# Altium PCB PCB2.PcbDoc
Units mm, origin at the board's own origin, x right, y up, seen from the top; angles counter-clockwise.
Board outline 152.4 x 101.6 mm, 2 copper layers (Top Layer, Bottom Layer); 41 components, 48 nets, 134 pads, 0 vias.
Unrouted connection lines stored in the file: 71.
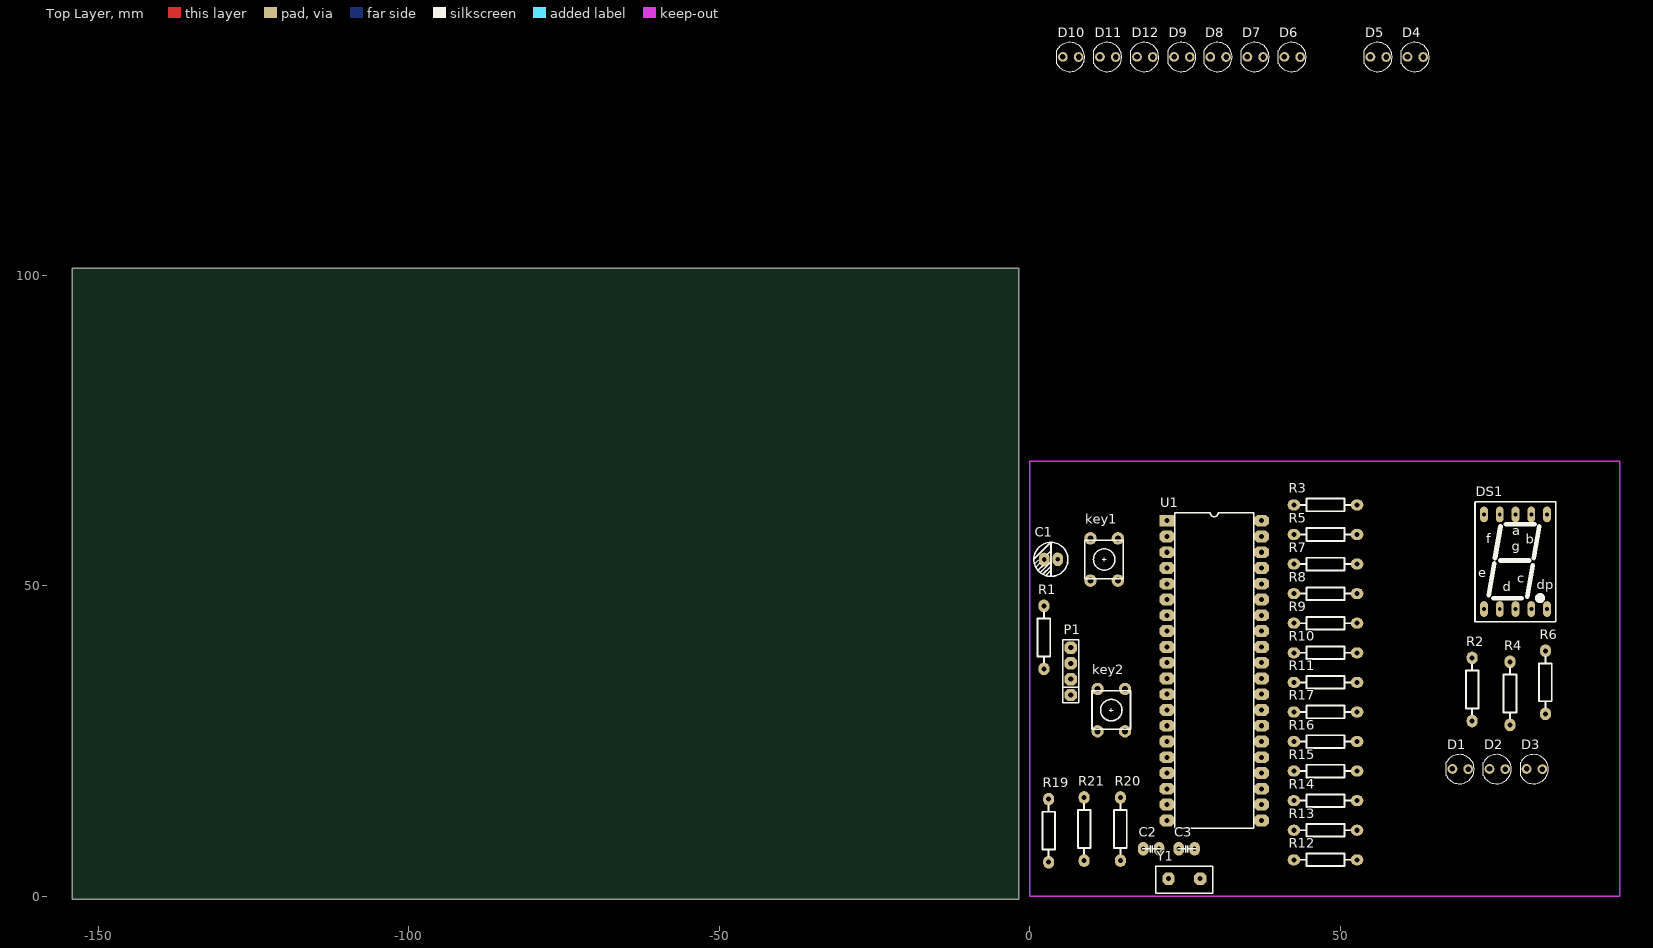
[diagram p0: Top Layer view]
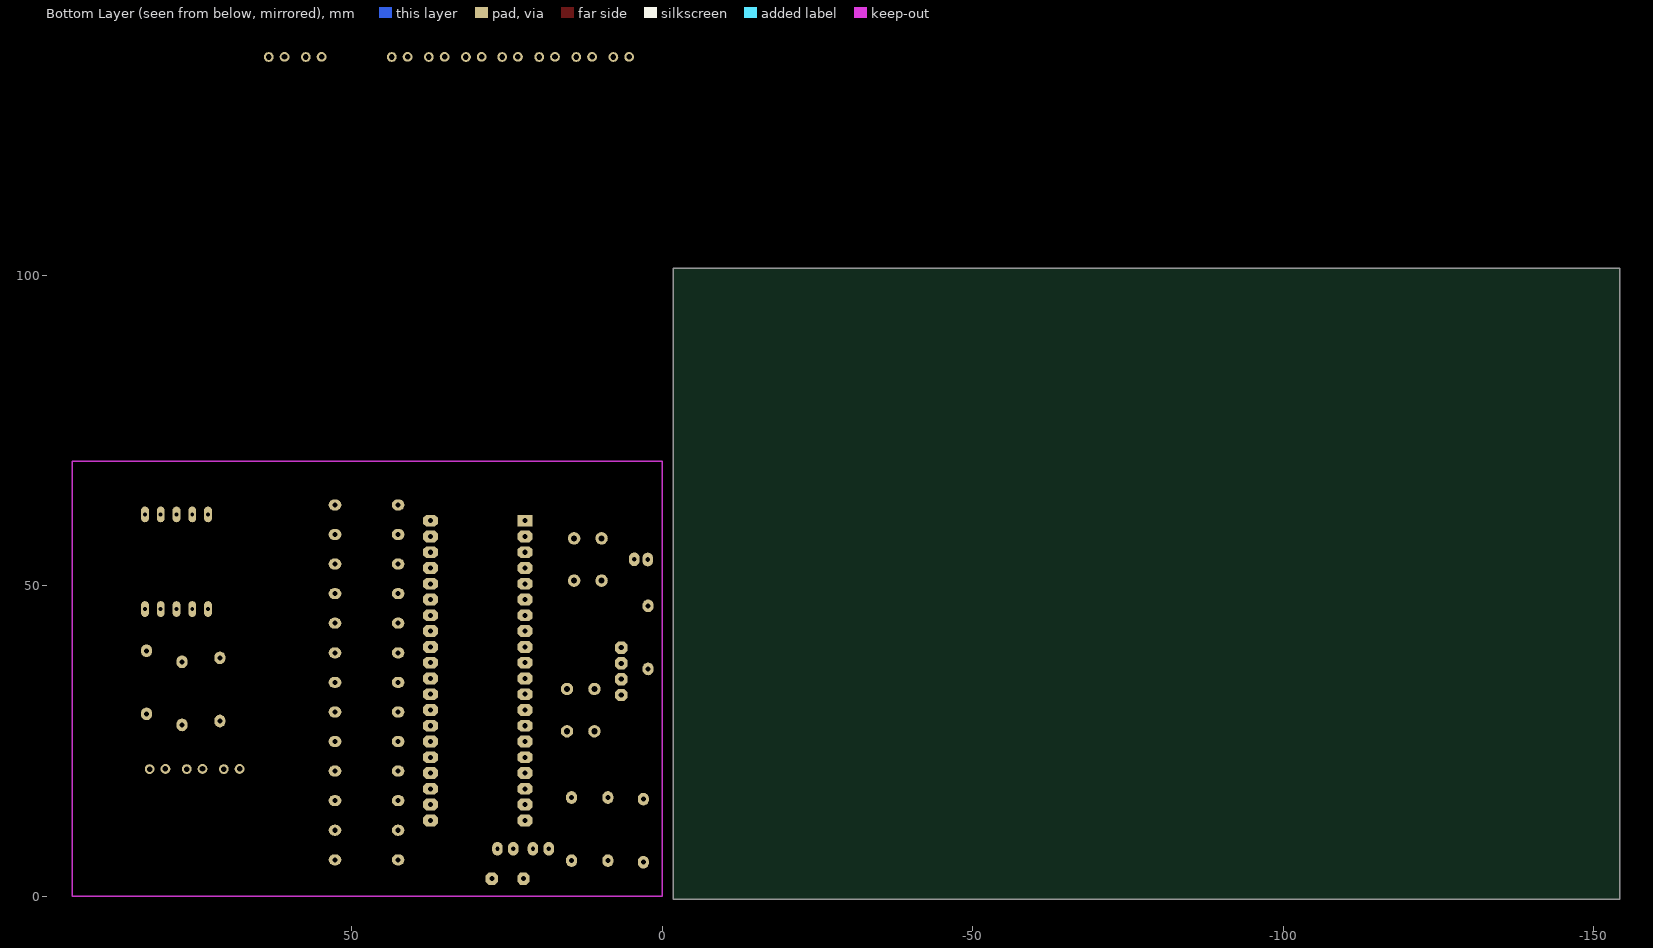
[diagram p1: Bottom Layer view, seen from below]

## Layer stack, top to bottom
Top Layer: signal copper 0.0356
Dielectric: dielectric 0.32, FR-4, Dk 4.8
Bottom Layer: signal copper 0.0356

## Board outline
-154.178,-0.508 -1.778,-0.508 -1.778,101.092 -154.178,101.092

## Design rules (kind name [scope] priority, off if disabled: settings)
Clearance [All] p1: gap=0.254
PolygonConnect [All] p1: connectstyle=Relief reliefconductorwidth=0.254 reliefentries=4 polygonreliefangle="90 Angle"
RoutingVias [All] p1: holewidth=0.711 width=1.27 viastyle="Through Hole" minholewidth=0.711 minwidth=1.27 maxholewidth=0.711 maxwidth=1.27
SilkscreenOverComponentPads [All] p1: minsilkscreentomaskgap=0.254
SolderMaskExpansion [All] p1: expansion=0.102
Width [All] p1: maxlimit=0.254 minlimit=0.254 preferedwidth=0.254
27 further rules are at their usual default settings.

## Components (designator, comment, footprint, x,y, rotation, side; value= is the part's Value field where it differs from the comment)
C1 "电解电容" D50V10UF 4.445,54.229 r180 top
C2 "33p" D104 18.288,7.62 r0 top
C3 "33p" D104 24.003,7.62 r0 top
D1 "B_G" LED 68.072,20.447 r0 top
D2 "B_Y" LED 74.041,20.447 r0 top
D3 "B_R" LED 80.01,20.447 r0 top
D4 "X_G" LED 60.833,135.128 r0 top
D5 "D_R" LED 54.864,135.128 r0 top
D6 "X_Y" LED 41.021,135.128 r0 top
D7 "D_Y" LED 35.052,135.128 r0 top
D8 "X_R" LED 29.083,135.128 r0 top
D9 "D_G" LED 23.241,135.128 r0 top
D10 "N_R" LED 5.334,135.128 r0 top
D11 "N_Y" LED 11.303,135.128 r0 top
D12 "N_G" LED 17.272,135.128 r0 top
DS1 "YELLOWCC" 0.5INCH-DISP 73.152,46.228 r0 top
key1 "KEY" 6X6X? 9.779,50.8 r0 top
key2 "KEY" 6X6X? 10.922,26.543 r0 top
P1 "Header 4" SIP4 6.604,32.385 r180 top
R1 "10K" AXIAL0.4 2.286,41.656 r270 top
R2 "10K" AXIAL0.4 71.247,33.274 r270 top
R3 "10K" AXIAL0.4 47.625,62.992 r180 top
R4 "10K" AXIAL0.4 77.343,32.639 r270 top
R5 "10K" AXIAL0.4 47.625,58.229 r180 top
R6 "10K" AXIAL0.4 83.058,34.417 r270 top
R7 "10K" AXIAL0.4 47.625,53.467 r180 top
R8 "10K" AXIAL0.4 47.625,48.704 r180 top
R9 "10K" AXIAL0.4 47.625,43.942 r180 top
R10 "10K" AXIAL0.4 47.625,39.179 r180 top
R11 "10K" AXIAL0.4 47.625,34.417 r180 top
R12 "10K" AXIAL0.4 47.625,5.842 r0 top
R13 "10K" AXIAL0.4 47.625,10.604 r0 top
R14 "10K" AXIAL0.4 47.625,15.367 r0 top
R15 "10K" AXIAL0.4 47.625,20.129 r0 top
R16 "10K" AXIAL0.4 47.625,24.892 r0 top
R17 "10K" AXIAL0.4 47.625,29.654 r0 top
R19 "10K" AXIAL0.4 3.048,10.541 r270 top
R20 "10K" AXIAL0.4 14.605,10.795 r270 top
R21 "10K" AXIAL0.4 8.763,10.795 r270 top
U1 "STC89C52RC" DIP40C 22.098,60.452 r0 top
Y1 "XTAL" 晶振 22.352,2.794 r0 top

## Footprints (in the part's own frame and the unit in brackets; to place one, negate y for a bottom-side part, rotate by r counter-clockwise, add the part's x,y. Pads: shape width x height; smd on the part's side, far side on the other; paste and mask are expansions set on the pad)
0.5INCH-DISP [mm]
  oval 1.27x2.54 hole 0.635: a(0,15.24) b(2.54,15.24) c(0,0) d(7.62,0) dp(2.54,0) e(5.08,0) f(10.16,15.24) g(10.16,0) m1(5.08,15.24) m2(7.62,15.24)
  silkscreen extent -1.45,-2.06 11.56,17.25
6X6X? [mm]
  round 2 hole 1: 1(0,0) 2(4.42,0) 3(4.42,6.807) 4(0,6.807)
  silkscreen extent -0.89,0.3 5.31,6.5
AXIAL0.4 [mil]
  oval 80x70 hole 32: 1(-200,0) 2(200,0)
  silkscreen extent -160,-40 160,40
D50V10UF [mil]
  oval 66.93x86.61 hole 30: 1(-2,0) 2(83,1)
  silkscreen extent -67,-108 149,108
D104 [mm]
  oval 1.7x2.2 hole 0.7: 1(0,0) 2(2.54,0)
  silkscreen extent -0.15,-0.55 2.82,0.52
DIP40C [mm]
  rect 2.4x1.9 hole 0.813: 1(0,0)
  oct 2.4x1.9 hole 0.813: 2(0,-2.54) 3(0,-5.08) 4(0,-7.62) 5(0,-10.16) 6(0,-12.7) 7(0,-15.24) 8(0,-17.78) 9(0,-20.32) 10(0,-22.86) 11(0,-25.4) 12(0,-27.94) 13(0,-30.48) 14(0,-33.02) 15(0,-35.56) 16(0,-38.1) 17(0,-40.64) 18(0,-43.18) 19(0,-45.72) 20(0,-48.26) 21(15.24,-48.26) 22(15.24,-45.72) 23(15.24,-43.18) 24(15.24,-40.64) 25(15.24,-38.1) 26(15.24,-35.56) 27(15.24,-33.02) 28(15.24,-30.48) 29(15.24,-27.94) 30(15.24,-25.4) 31(15.24,-22.86) 32(15.24,-20.32) 33(15.24,-17.78) 34(15.24,-15.24) 35(15.24,-12.7) 36(15.24,-10.16) 37(15.24,-7.62) 38(15.24,-5.08) 39(15.24,-2.54) 40(15.24,0)
  silkscreen extent 1.27,-49.53 13.97,1.27
LED [mil]
  round 62 hole 35.43: 1(0,1) 2(100,0)
  silkscreen extent -38,-93 138,93
SIP4 [mm]
  oct 2x2 hole 0.813: 1(0,0) 2(0,-2.54) 3(0,-5.08) 4(0,-7.62)
  silkscreen extent -1.27,-8.89 1.27,1.27
晶振 [mm]
  oct 2x2 hole 0.8: 1(0,0) 2(5.08,0)
  silkscreen extent -2.06,-2.31 7.11,2.03

## Part data
C1: "Capaci"
C2 C3: library part 普通电容, "Capaci"
D1 D2 D3 D4 D5 D6 D7 D8 D9 D10 D11 D12: library part LED
DS1: "Common Cathhode Seven-Segment Display, Right Hand Decimal"
P1: "Header, 4-Pin"
R1 R2 R3 R4 R5 R6 R7 R8 R9 R10 R11 R12 R13 R14 R15 R16 R17 R19 R20 R21: library part RES
U1: library part AT89C51
Y1: library part XTA

## Nets (pads, with @x,y where several pads share a name; then routed paths per layer and width w, separated by ;. In a path a pad name is that pad's centre, name@x,y a point inside that pad or via, vN(x,y) a via of type N, cw(c..) or ccw(c..) an arc to the next point about the centre after c; other vN are vias at no path point)
A: DS1.a R3.2
B: DS1.b R5.2
B_G: D1.2 R15.2
B_R: D3.2 R17.2
B_Y: D2.2 R16.2
C: DS1.c R7.2
D: DS1.d R8.2
D_G: D9.2 R6.2
D_R: D5.2 R2.2
D_Y: D7.2 R4.2
E: DS1.e R9.2
F: DS1.f R10.2
G: DS1.g R11.2
GND: C2.2 C3.2 key2.1 P1.1 R1.2 U1.20
INT0: key2.2 U1.12
M1: DS1.m1 U1.27
M2: DS1.m2 U1.28
N_G: D12.2 R19.1
N_R: D10.2 R21.2
N_Y: D11.2 R20.2
NetR2_1: R2.1 U1.1
NetR3_1: R3.1 U1.39
NetR4_1: R4.1 U1.2
NetR5_1: R5.1 U1.38
NetR6_1: R6.1 U1.3
NetR7_1: R7.1 U1.37
NetR8_1: R8.1 U1.36
NetR9_1: R9.1 U1.35
NetR10_1: R10.1 U1.34
NetR11_1: R11.1 U1.33
NetR12_1: R12.1 U1.21
NetR13_1: R13.1 U1.22
NetR14_1: R14.1 U1.23
NetR15_1: R15.1 U1.24
NetR16_1: R16.1 U1.25
NetR17_1: R17.1 U1.26
NetR19_2: R19.2 U1.15
NetR20_1: R20.1 U1.16
NetR21_1: R21.1 U1.17
RESET: C1.2 key1.2 R1.1 U1.9
RXD: P1.4 U1.10
TXD: P1.3 U1.11
VCC: C1.1 D1.1 D2.1 D3.1 D4.1 D5.1 D6.1 D7.1 D8.1 D9.1 D10.1 D11.1 D12.1 key1.1 P1.2 U1.31 U1.40
X1: C2.1 U1.19 Y1.1
X2: C3.1 U1.18 Y1.2
X_G: D4.2 R14.2
X_R: D8.2 R12.2
X_Y: D6.2 R13.2
pads on no net: DS1.dp key1.3 key1.4 key2.3 key2.4 U1.4 U1.5 U1.6 U1.7 U1.8 U1.13 U1.14 U1.29 U1.30 U1.32

## Keep-outs
Keep-Out Layer:
  lines w0.254: 0,0 0,70 95,70 95,0 0,0

## Text inside footprints (layer, text, board x,y; h text height)
DS1: Top Overlay "c" at 78.486,50.495 h1.52; Top Overlay "dp" at 81.636,49.428 h1.52; Top Overlay "e" at 72.263,51.384 h1.52; Top Overlay "d" at 76.2,49.098 h1.52; Top Overlay "a" at 77.724,58.115 h1.52; Top Overlay "g" at 77.597,55.575 h1.52; Top Overlay "b" at 79.883,56.718 h1.52; Top Overlay "f" at 73.533,56.845 h1.52